# Altium PCB PCB.PcbDoc
Units mm, origin at the board's own origin, x right, y up, seen from the top; angles counter-clockwise.
Board outline 64.5 x 51 mm, 2 copper layers (Top Layer, Bottom Layer); 31 components, 10 nets, 70 pads, 5 vias.
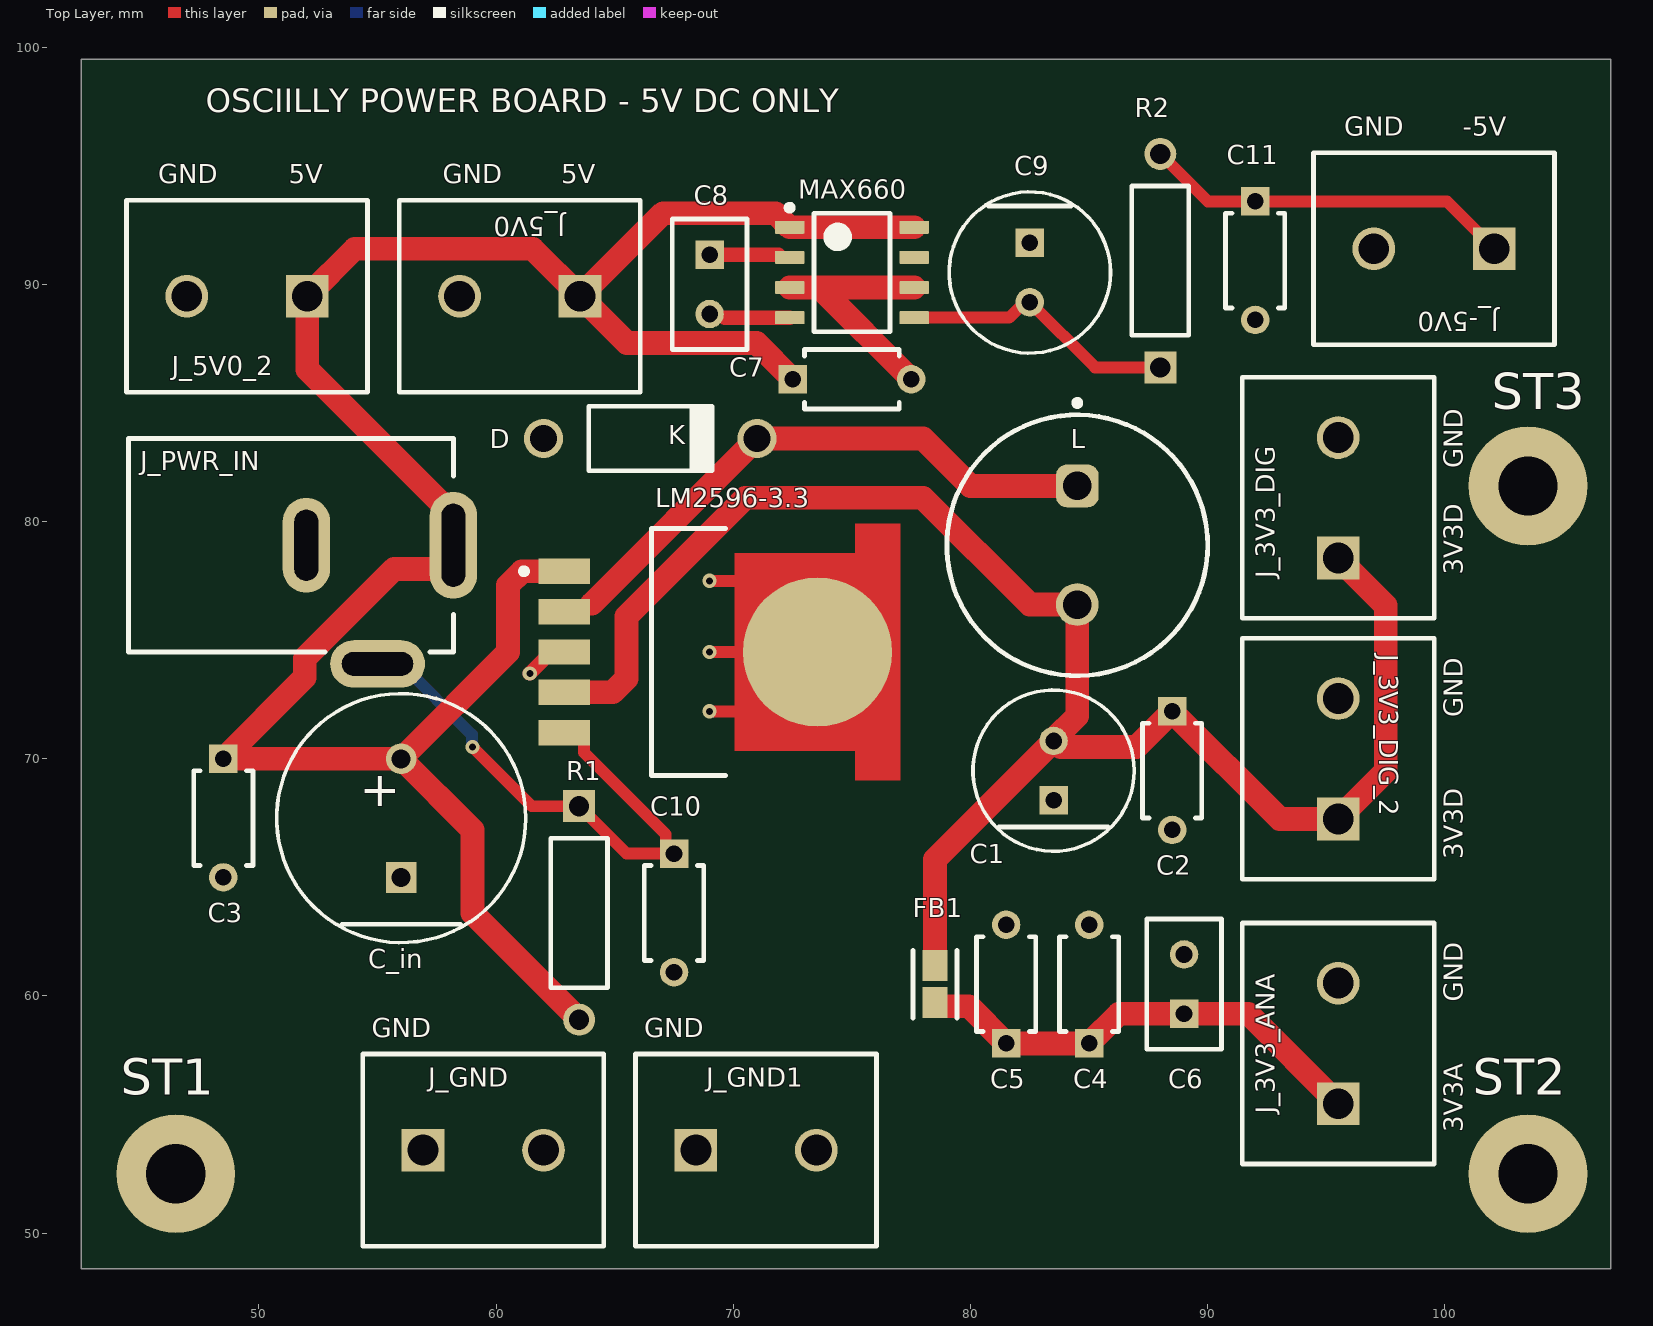
[diagram p0: Top Layer view]
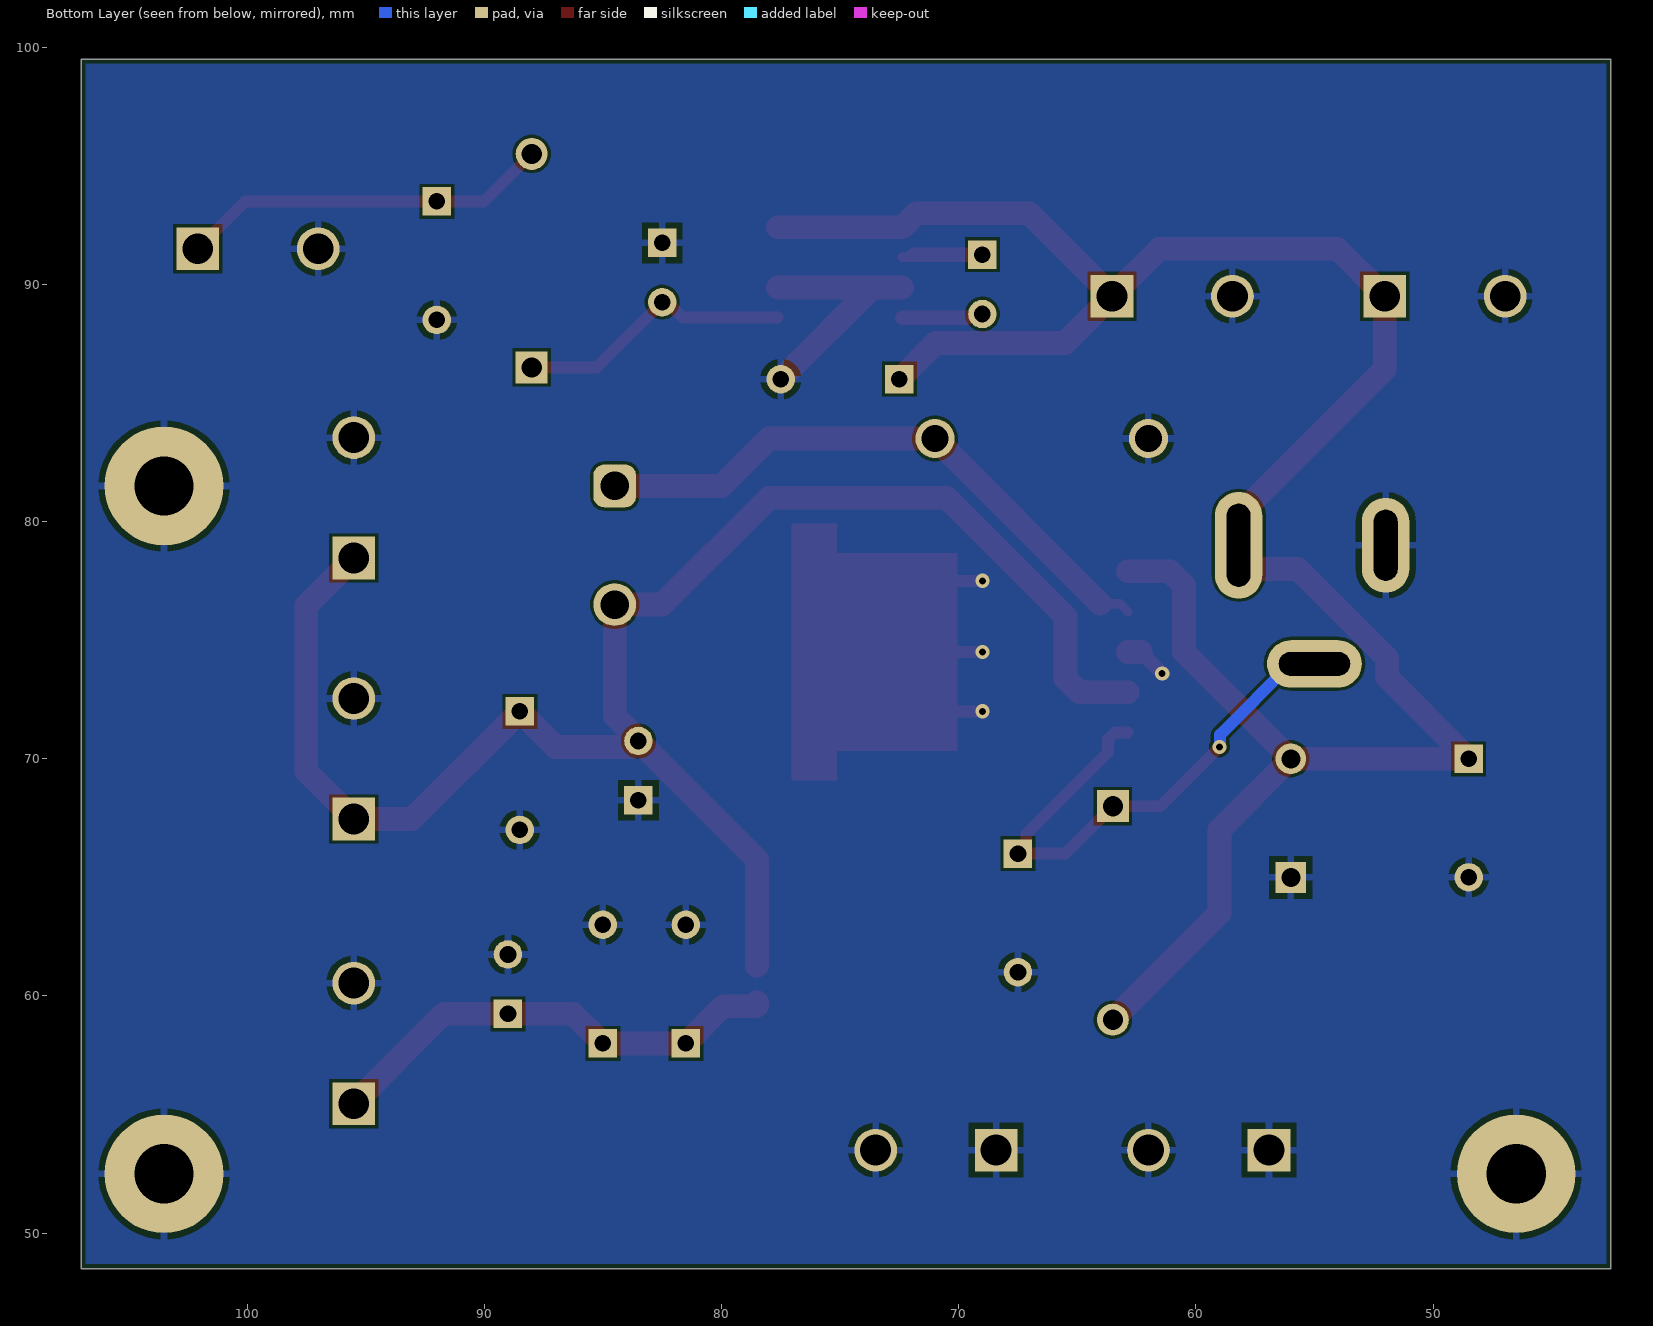
[diagram p1: Bottom Layer view, seen from below]
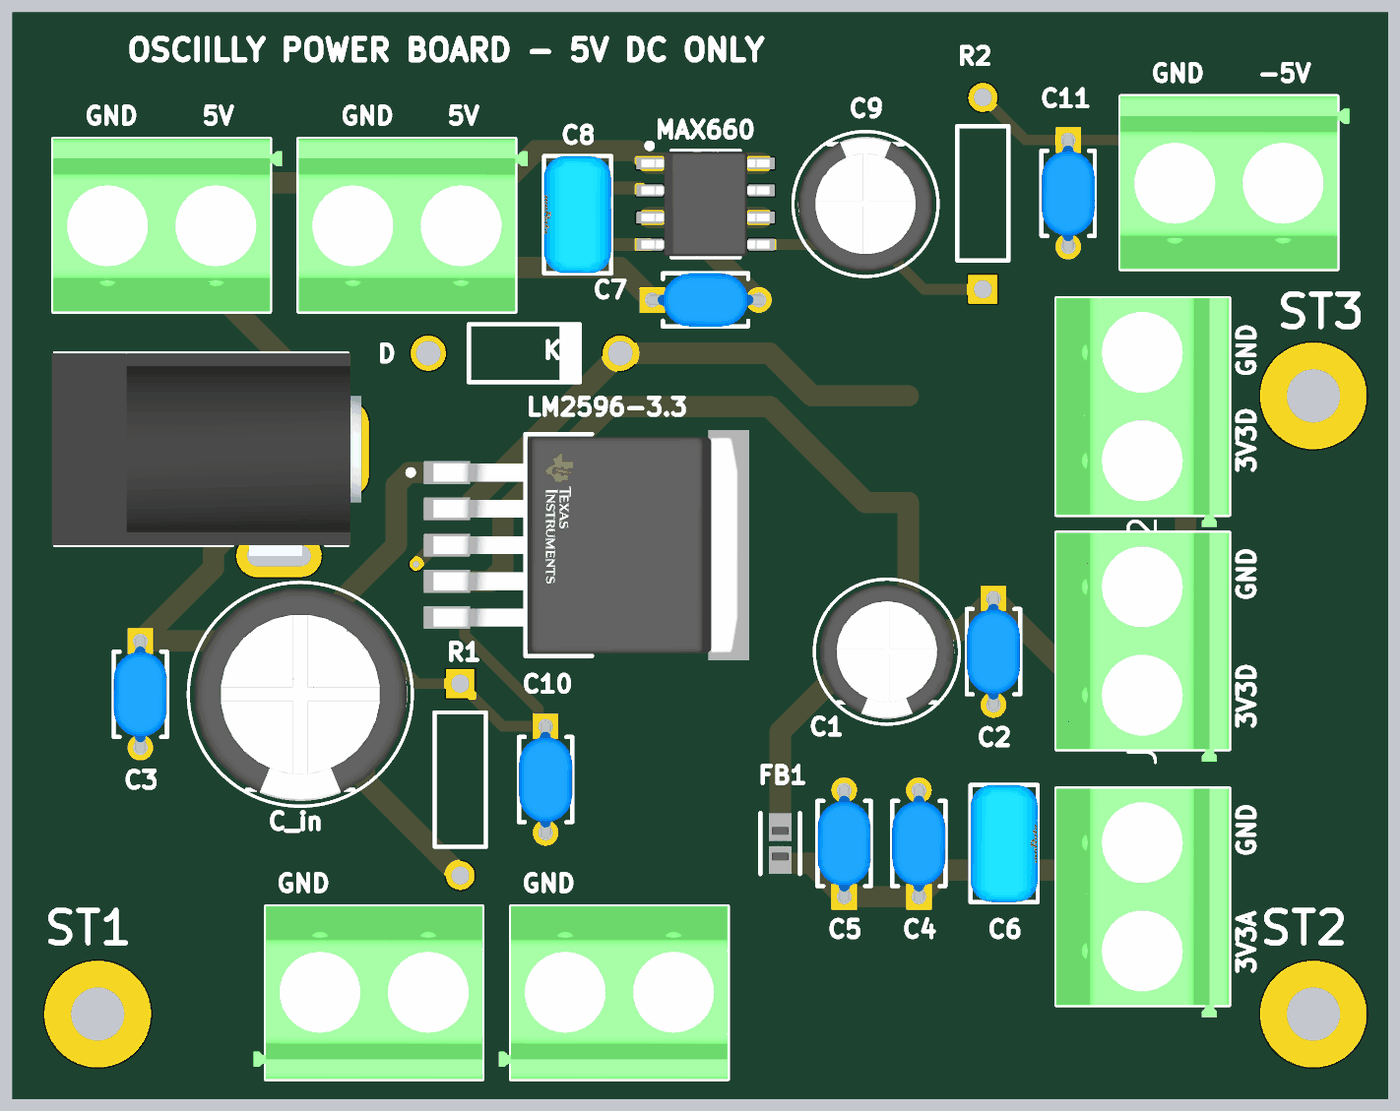
[diagram p2: 3D render of the assembled board from above, using the file's embedded part models]

## Layer stack, top to bottom
Top Solder: solder mask 0.0102, Solder Resist, Dk 3.5
Top Layer: signal copper 0.0356
Dielectric 1: dielectric 0.32, FR-4, Dk 4.8
Bottom Layer: signal copper 0.0356
Bottom Solder: solder mask 0.0102, Solder Resist, Dk 3.5

## Board outline
42.5,48.5 42.5,99.5 107,99.5 107,48.5

## Design rules (kind name [scope] priority, off if disabled: settings)
BoardOutlineClearance [All] p1: gap=0.2 ignorepadtopadclearanceinfootprint=FALSE
Clearance [All] p1: gap=0.127 ignorepadtopadclearanceinfootprint=FALSE except(0.25: Arc-Hole Track-Hole SMDPad-Hole THPad-Hole Via-Hole Fill-Hole Poly-Hole Region-Hole Text-Hole)
ComponentClearance [All] p1: gap=0.127 collisioncheckmode=3 verticalgap=0.127 showdistances=TRUE
DiffPairsRouting [All] p1: maxlimit=0.254 minlimit=0.127 mostfreqgap=0.127 toplayer_minwidth=0.127 toplayer_maxwidth=25.4 toplayer_prefwidth=0.127 bottomlayer_minwidth=0.127 bottomlayer_maxwidth=25.4 bottomlayer_prefwidth=0.127 maxuncoupledlength=12.7
Height [All] p1: minheight=0 maxheight=1816.048 prefheight=12.7
HoleSize [All] p1: absolutevalues=TRUE maxlimit=6.3 minlimit=0.3 maxpercent=80.000 minpercent=20.000
HoleToHoleClearance [All] p1: gap=0.25 allowstackedmicrovias=FALSE
MinimumAnnularRing [All] p1: minimumring=0.076
MinimumSolderMaskSliver [All] p1: minsoldermaskwidth=0
PlaneClearance [All] p1: clearance=0.127
PlaneConnect PlaneConnectPowerPads [InPadClass('PowerPads')] p1: planeconnectstyle=Direct reliefexpansion=0.508 reliefentries=4 reliefconductorwidth=0.254 reliefairgap=0.254
PlaneConnect [All] p2: pad.planeconnectstyle=Relief pad.reliefexpansion=0.3 pad.reliefentries=4 pad.reliefconductorwidth=0.127 pad.reliefairgap=0.127 via.planeconnectstyle=Direct via.reliefexpansion=0.3 via.reliefentries=4 via.reliefconductorwidth=0.127 via.reliefairgap=0.127
PolygonConnect PolygonConnectPowerPads [All vs (InPadClass('PowerPads'))] p1: connectstyle=Direct reliefconductorwidth=0.254 reliefentries=4 polygonreliefangle="90 Angle" airgapwidth=0.254
PolygonConnect [All] p2: thpad.connectstyle=Relief thpad.reliefconductorwidth=0.3 thpad.reliefentries=4 thpad.polygonreliefangle="90 Angle" thpad.airgapwidth=0.25 smdpad.connectstyle=Relief smdpad.reliefconductorwidth=0.3 smdpad.reliefentries=4 smdpad.polygonreliefangle="90 Angle" smdpad.airgapwidth=0.25 via.connectstyle=Direct via.reliefconductorwidth=0.127 via.reliefentries=4 via.polygonreliefangle="90 Angle" via.airgapwidth=0.127
RoutingVias [All] p1: holewidth=0.3 width=0.6 viastyle="Through Hole" minholewidth=0.3 minwidth=0.6 maxholewidth=0.6 maxwidth=6.6
SilkToSilkClearance [All] p1: silktosilkclearance=0
SilkToSolderMaskClearance [IsPad] p1: minsilkscreentomaskgap=0.127 clearancetoexposedcopper=TRUE
SolderMaskExpansion [All] p1: expansion=0.075 istentingtop=FALSE
SupplyNets "Schematic Supply Nets" [InNet('GND')] p1: voltage=0.000
Width [All] p1: maxlimit=25.4 minlimit=0.127 preferedwidth=0.127 minimp=50.000000 maximp=50.000000 favimp=50.000000
20 further rules are at their usual default settings.

## Components (designator, comment, footprint, x,y, rotation, side; value= is the part's Value field where it differs from the comment)
C1 "220UF" FP-RAD-TH-D_6_3_0_5-L_11-MFG 83.5,69.5 r90 top
C2 "0.1uF" FP-RDE0M1-MFG 88.5,69.5 r270 top
C3 "0.1uF" FP-RDE0M1-MFG 48.5,67.5 r270 top
C4 "0.1uF" FP-RDE0M1-MFG 85,60.5 r90 top
C5 "10nF" FP-RDE0M1-MFG 81.5,60.5 r90 top
C6 "10uF" FP-RDE2P1-MFG 89,60.5 r90 top
C7 "0.1uF" FP-RDE0M1-MFG 75,86 r0 top
C8 "10uF" FP-RDE2P1-MFG 69,90 r270 top
C9 "47uF" FP-RAD-TH-D_6_3_0_5-L_11-MFG 82.5,90.5 r270 top
C10 "0.1uF" FP-RDE0M1-MFG 67.5,63.5 r270 top
C11 "0.1uF" FP-RDE0M1-MFG 92,91 r270 top
C_in "680uF" FP-RAD-TH-D_10_0_5-L_25_2-MFG 56,67.5 r90 top
D "1N5824" FAIR-DO-41-2_V 66.5,83.5 r0 top
FB1 "BLM18KG700TZ1D" FP-BLM18-0_15-t0_6-d1_2-IPC_A 78.5,60.5 r270 top
J_3V3_ANA "1729128" PHOE-1729128-2_V 95.5,58 r90 top
J_3V3_DIG "1729128" PHOE-1729128-2_V 95.5,81 r90 top
J_3V3_DIG_2 "1729128" PHOE-1729128-2_V 95.5,70 r90 top
J_5V0 "1729128" PHOE-1729128-2_V 61,89.5 r180 top
J_5V0_2 "1729128" PHOE-1729128-2_V 49.5,89.5 r180 top
J_-5V0 "1729128" PHOE-1729128-2_V 99.54,91.5 r180 top
J_GND "1729128" PHOE-1729128-2_V 59.46,53.5 r0 top
J_GND1 "1729128" PHOE-1729128-2_V 70.96,53.5 r0 top
J_PWR_IN "KLDX-0202-B" KYCN-KLDX-0202-B_V 44.5,79 r0 top
L "33 UH" WE-TIS_1111 1354.5,-1191 r270 top
LM2596-3.3 "LM2596SX-3.3/NOPB" FP-KTT0005B-MFG 71,74.5 r270 top
MAX660 "MAX660M/NOPB" D0008A_L 75,90.5 r0 top
R1 "100k" RESA60-630X240 63.5,63.5 r270 top
R2 "1Ohm" RESA60-630X240 88,91 r90 top
ST1 "PTH-M2D5X5" PTH-M2D5X5 46.5,52.5 r0 top
ST2 "PTH-M2D5X5" PTH-M2D5X5 103.5,52.5 r0 top
ST3 "PTH-M2D5X5" PTH-M2D5X5 103.5,81.5 r0 top

## Footprints (in the part's own frame and the unit in brackets; to place one, negate y for a bottom-side part, rotate by r counter-clockwise, add the part's x,y. Pads: shape width x height; smd on the part's side, far side on the other; paste and mask are expansions set on the pad)
D0008A_L [mm] "SOIC, 8-Leads, Body 5x4mm, Pitch 1.27mm, IPC High Density"
  rrect18% 1.25x0.55 smd: 1(-2.625,1.905) 2(-2.625,0.635) 3(-2.625,-0.635) 4(-2.625,-1.905) 5(2.625,-1.905) 6(2.625,-0.635) 7(2.625,0.635) 8(2.625,1.905)
  silkscreen extent -2.75,-2.5 1.6,2.85, body extent -3,-2.45 3,2.45, height 1.63
FAIR-DO-41-2_V [mm] "2-Leads, Axial leaded, Body 2.72x5.2mm, Pin Spacing 9mm"
  round 1.65 hole 1.15: 1(-4.5,0) 2(4.5,0)
  silkscreen extent -2.6,-1.36 2.6,1.36, body extent -4.93,-1.36 4.93,1.36, height 2.71
FP-BLM18-0_15-t0_6-d1_2-IPC_A [mm]
  rect 1.306x1.058 smd paste+0 mask+0: 1(-0.776,0) 2(0.776,0)
  silkscreen extent -1.43,-0.93 1.43,0.93, body extent -1.93,-1.03 1.93,1.03, height 0.25
FP-KTT0005B-MFG [mm]
  rect 1.07x2.16 smd paste+0 mask+0: 1(-3.4,-8.13) 2(-1.7,-8.13) 3(0,-8.13) 4(1.7,-8.13) 5(3.4,-8.13)
  round 6.291 smd paste+0 mask+0: 6(0,2.545)
  Top Layer region: -5.4,6.04 5.4,6.04 5.4,4.13 4.165,4.13 4.165,-0.95 -4.165,-0.95 -4.165,4.13 -5.4,4.13 -5.4,6.04
  silkscreen extent -5.21,-9.95 5.21,-1.33, body extent -5.5,-9.31 5.5,6.14, height 0.25
FP-RAD-TH-D_6_3_0_5-L_11-MFG [mm]
  rect 1.2x1.2 hole 0.7 paste-2539.97 mask+0: 1(-1.25,0)
  round 1.2 hole 0.7 paste-2539.97 mask+0: 2(1.25,0)
  silkscreen extent -3.4,-3.4 3.4,3.4, body extent -3.5,-3.5 3.5,3.5, height 0.25
FP-RAD-TH-D_10_0_5-L_25_2-MFG [mm]
  rect 1.3x1.3 hole 0.8 paste-2539.97 mask+0: 1(-2.5,0)
  round 1.3 hole 0.8 paste-2539.97 mask+0: 2(2.5,0)
  silkscreen extent -5.25,-5.25 5.25,5.25, body extent -5.35,-5.35 5.35,5.35, height 0.25
FP-RDE0M1-MFG [mm]
  rect 1.2x1.2 hole 0.7 paste-2539.97 mask+0: 1(-2.5,0)
  round 1.2 hole 0.7 paste-2539.97 mask+0: 2(2.5,0)
  silkscreen extent -2,-1.25 2,1.25, body extent -3.2,-1.35 3.2,1.35, height 0.25
FP-RDE2P1-MFG [mm]
  rect 1.2x1.2 hole 0.7 paste-2539.97 mask+0: 1(-1.25,0)
  round 1.2 hole 0.7 paste-2539.97 mask+0: 2(1.25,0)
  silkscreen extent -2.75,-1.58 2.75,1.58, body extent -2.85,-1.68 2.85,1.68, height 0.25
KYCN-KLDX-0202-B_V [mm] "3 Conductor Jack, 9 x 14.5 mm Body"
  oval 2x4.5 hole 1 slot 3.5 at 90 deg: 1(13.7,0)
  oval 2x4 hole 1 slot 3 at 90 deg: 2(7.5,0)
  oval 4x2 hole 1 slot 3 at 0 deg: 3(10.5,-5)
  silkscreen extent 0,-4.5 13.7,4.5, body extent -0.15,-5 14.35,4.5, height 11
PHOE-1729128-2_V [mm] "Receptacle, 2-Leads, Body 8.1x10.16mm, Pitch 5.08mm"
  rect 1.8x1.8 hole 1.3: 1(-2.54,0)
  round 1.8 hole 1.3: 2(2.54,0)
  silkscreen extent -5.08,-4.05 5.08,4.05, body extent -5.65,-4.05 5.08,4.05, height 10.01
PTH-M2D5X5 [mm]
  round 5 hole 2.5: 1(0,0)
RESA60-630X240 [mm] "Axial Resistor, 2-Leads, Dia 2.4mm, Body Length 6.3mm"
  rect 1.35x1.35 hole 0.85: 1(-4.5,0)
  round 1.35 hole 0.85: 2(4.5,0)
  silkscreen extent -3.15,-1.2 3.15,1.2, body extent -3.15,-1.2 3.15,1.2, height 2.4
WE-TIS_1111 [mm] "THT Shielded Radial Leaded Wire Wound Inductor, body diameter 11mm"
  rrect50% 1.8x1.8 hole 1.2: 1(-1272.5,-1270)
  round 1.8 hole 1.2: 2(-1267.5,-1270)
  silkscreen extent -1276.12,-1275.5 -1264.5,-1264.5, body extent -1275.3,-1275.3 -1264.7,-1264.7, height 10.6

## Part data
C1: library part CMP-05427-000685-1, "Aluminum Electrolytic Capacitors (Radial Lead Type) AEC-Q200 Qualified 220uF ±20% 16V", Capacitance=220uF, Case/Package=Radial, Max Operating Temperature=105°C, Min Operating Temperature=-55°C, Package Quantity=2000, Ripple Current=180mA, Tolerance=20%, Voltage Rating=16V, Diameter=6.3mm, Height=11.2mm, Height - Seated (Max)=0.48inch, Lead Diameter=0.5mm, Lead Pitch=5mm, Lead/Base Style=Straight, Length=11.2mm, Life (Hours)=1000Hour, Mount="Through Hole", Packaging="Ammo Pack", Radiation Hardening=No, RoHS Compliant=Yes, Series=NHG, Termination=Radial, Voltage Rating (DC)=16V
C2 C3 C4 C7 C10 C11: library part CMP-06035-027534-1, "Ceramic Capacitor 100nF ±10% 25V X7R Radial", Capacitance=100nF, Case/Package=Radial, Dielectric=X7R, Max Operating Temperature=125°C, Min Operating Temperature=-55°C, Package Quantity=2000, Resistor Type=Ceramic, Tolerance=10%, Voltage Rating=25V, Height=3.5mm, Height - Seated (Max)=0.236inch, Lead Diameter=0.5mm, Lead Free="Lead Free", Lead Pitch=0.197inch, Length=0.157inch, Mount="Through Hole", Packaging="Tape and Reel", Termination=Radial, Voltage Rating (DC)=25V, Width=3.5mm
C5: library part CMP-06035-046067-1, "Ceramic Capacitor 10nF ±10% 100V X7R Radial", Case/Package=Radial, Dielectric=X7R, Max Operating Temperature=125°C, Min Operating Temperature=-55°C, Package Quantity=1, Resistor Type=Ceramic, Tolerance=10%, Voltage Rating=100V, Capacitance=10nF, Height=3.5mm, Height - Seated (Max)=0.236inch, Lead Diameter=0.5mm, Lead Pitch=0.197inch, Lead/Base Style=Kinked, Length=0.157inch, Mount="Through Hole", Packaging="Cut Tape", Termination=Radial, Voltage Rating (DC)=100V, Width=0.098inch
C6 C8: library part CMP-06035-025589-1, "Ceramic Capacitor 10uF ±10% 25V X7S Radial", Case/Package=Radial, Dielectric=X7S, Max Operating Temperature=125°C, Min Operating Temperature=-55°C, Package Quantity=500, Resistor Type=Ceramic, Tolerance=10%, Voltage Rating=25V, Capacitance=10uF, Height=4mm, Height - Seated (Max)=0.236inch, Lead Diameter=0.5mm, Lead Pitch=0.098inch, Lead/Base Style=Kinked, Length=5.5mm, Mount="Through Hole", Packaging=Bulk, Termination=Radial, Voltage Rating (DC)=25V, Width=0.124inch
C9: library part CMP-05427-000942-1, "Aluminum Electrolytic Capacitors (Radial Lead Type) 47uF ±20% 63V", Case/Package=Radial, ESR (Equivalent Series Resistance)=210mR, Max Operating Temperature=105°C, Min Operating Temperature=-40°C, Package Quantity=1, Ripple Current=284mA, Tolerance=20%, Voltage Rating=63V, Capacitance=47uF, Diameter=6.3mm, Height=11.2mm, Height - Seated (Max)=0.5inch, Impedance=210mR, Lead Diameter=0.5mm, Lead Free="Lead Free", Lead Pitch=5mm, Length=11.2mm, Life (Hours)=5000Hour, Mount="Through Hole", Packaging="Tape and Reel", Radiation Hardening=No, REACH SVHC=Yes, RoHS Compliant=Yes, Series=FR, Termination=Radial, Voltage Rating (DC)=63V
C_in: library part CMP-05427-001807-1, "Aluminum Electrolytic Capacitors (Radial Lead Type) 680uF ±20% 35V"
D: library part CMP-0892-00012-1, "Zener Diode, 7.5V, 1W, 5%, -65 to 200 degC, 2-Pin DO-41, Body 2.72 x 5.2 mm, RoHS", Manufacturer="Fairchild Semiconductor", Operating and Storage Temperature Range="-65 to 200 degC", PartNumber=1N4737A, Test Current IZ (mA)=34, Tolerance=5%, ComponentLink1Description="Manufacturer URL", ComponentLink1URL=http://www.fairchildsemi.com/, ComponentLink2Description=Datasheet, ComponentLink2URL=http://www.fairchildsemi.com/ds/1N/1N4744A.pdf, ComponentLink3Description="Package Specification", ComponentLink3URL=http://www.fairchildsemi.com/dwg/DO/DO41A.pdf, DatasheetVersion="Rev. H3", IR (uA)=10, Mounting Technology="Through Hole", PackageDescription="2-Pin Axial leaded, Body 2.72 x 5.2 mm, Lead Spread 25.4 mm", PackageReference=DO-41-2, PackageVersion="Rev. 2", PD (W)=1, RoHS=TRUE, VZ (Max.) (V)=7.875, VZ (Min.) (V)=7.125, ZZ (Max) (ohm)=3.5
FB1: library part CMP-06046-001603-2, "Chip Ferrite Bead Array, 0603, 70Ω @ 100MHz, 25%, 0.022Ω, 3.5A", RoHS Compliant=Yes
J_3V3_ANA J_3V3_DIG J_3V3_DIG_2 J_5V0 J_5V0_2 J_-5V0 J_GND J_GND1: library part CMP-2000-05815-1, "PCB Terminal Block, 13.5 A, 400 V, 2-Pin THD, RoHS, Bulk", Current Rating=13500mA, Manufacturer="Phoenix Contact", Package Description="2-Pin Through Hole Device, Body 8.1 x 10.16 mm, Pitch 5.08 mm", Package Reference=1729128-2, Package Version=03/2015, Voltage Rating=400V, Datasheet URL=https://datasheet.ciiva.com/16046/1729128-16046181.pdf, Datasheet Version=12/2013, Manufacturer URL=http://www.phoenixcontact.com/, Mounting Technology=ThroughHole, No. of Positions=2, No. of Rows=1, Orientation=Horizontal, Package URL=https://www.phoenixcontact.com/online/portal/pi/pxc/product_detail_page/!ut/p/b1/3VdJjqNKFDxLH8AFycySyWY2ozFsEPOMMQaDOX1XedGL_1Vdm5YXJleknhSKeBkvI6EA8ncAo3AYoDhBQGco6KN7VURTdemj9us_IEKEZo_YHiPAEWEFmDGOHMORkqKYCORBZxgL7ZoaZYcbFFUZ3fqxSY6GOuxydWUuHqz1ynmMFygu583Bob0Ewr6Sd_l-5m-kAueHiB0jpRwZwe58wwtkpxtMYd_LmGcDRU02dRNEyWt6Y2ti5pSyJ_reIkzIulrqApdnbT11V5jnCKbYNCvhEM1MCpPByat_X379-iThf08CI5GfOPqfBeS3BRoBOdD55AKVv0iLwCMq-2BrzXWSGRH7pUGD9uwXQjiph3xL0DKQwdGa0JImiIOmBNOestqgwTHSSs2oOep-78apyXQBvNi8ZLaFjvjWvcaUEBu0MC6Wbe-d6mB0FAebo2lUWinqYaZs5DAYzV0RP9yitUjnGJ0iI9xhZkT42OCQNUJJhkgWINNQLP2JFP6OpMg3JCVg70jqHT0lvKOnhHf0lPuOnnLf0VPuWx6_dxwUIvwk5WMkT0kLL1mh61l2yZVSzG3pYV_bqo-mj6uMKwKwdnnW8Jh5RTOJzMOA5c-eJDaZQw4mTMPH02PvS_ZAqNVjVTo2WyYLkwH_KU1mmmG5kjRhDqPXLwwVHvVOjCM60-fpXvTDfMGW1PVFVS1r4e4yVDk4ZdNbkUHvqPqQSeian4UD39fNKmachqdJ1NJbyk8rXT9mXTvPk3oE5meulKGgiruPJek-4I9hTT6G8ZLOyRSm2RRVbThERQad5OS28hdt4YW4vG0stgYYzsWsK4_7y6DZMjJSCqri1kyiZR5vD7pwIrNR7QwPHTcLTI5qT7eRlpHrdGiupYlqQDJ7zy_CND8fWWBoLRXxk1RVcXiBQwbTD4Xi7KL-FuO94t9xaqweXzH, Packing=Bulk, PartNumber=1729128, Pitch=5.08mm, RoHS=TRUE
J_PWR_IN: library part CMP-0256-00001-1, "3 Conductor Power Jack, 2 break 2 aux contacts", ComponentLink1Description="Manufacturer URL", ComponentLink1URL=http://kycon.com/, ComponentLink2Description=Datasheet, ComponentLink2URL=http://anacapa.kycon.com/Catalog_PDF/KLDX_0202.pdf, Contact Finish=Brass, Mounting Technology="Through Hole", PackageDescription="Jack, 9 x 14.5 mm Body, 2.5 mm Center Pin Diameter", PackageReference=KLDX-0202-B, PartNumber=KLDX-0202-B
L: library part CMP-1406-00003-3, "Inductor Power Shielded Wirewound 33uH 20% 1KHz Ferrite 3.6A 61mOhm DCR RDL Tray", Ambient Temperature Range High=85°C, Ambient Temperature Range Low=-40°C, Case/Package=Radial, Current Rating=3A, DC Resistance (DCR)=57mΩ, Frequency=10MHz, Inductance=33µH, Inductance Tolerance=20%, Max DC Current=3.6A, Max Operating Temperature=125°C, Saturation Current=2.8A, Series Resistance=50mΩ, Test Frequency=1kHz, Core Material=Ferrite, Diameter=11mm, Features=Shielded, Height=11.5mm, Lead Diameter=650µm, Lead Pitch=5mm, Length=11mm, Min Operating Temperature=-40°C, Mount="Radial, Through Hole", Number of Pins=2, REACH SVHC=Unknown, RMS Current (Irms)=3.6A, RoHS=Compliant, Self Resonant Frequency=10MHz, Shielding=Shielded, Tolerance=20%, Width=11mm
LM2596-3.3: library part CMP-04918-000394-1, "IC REG BUCK 3.3V 3A TO263-5", Case/Package=TO-263-5, Max Input Voltage=40V, Max Operating Temperature=125°C, Max Output Current=3A, Min Input Voltage=4.5V, Min Operating Temperature=-40°C, Min Output Voltage=3.3V, Operating Supply Current=5mA, Package Quantity=500, Switching Frequency=173kHz, Efficiency=73%, Lead Free="Contains Lead", Min Supply Voltage=4.5V, Mount="Surface Mount", Nominal Output Voltage=3.3V, Number of Outputs=1, Number of Pins=5, Operating Supply Voltage=40V, Output Configuration=Positive, Output Current=3A, Output Type=Fixed, Output Voltage=3.3V, Packaging="Cut Tape", Quiescent Current=5mA, Radiation Hardening=No, REACH SVHC="No SVHC", RoHS Compliant=Yes, Series=LM2596, Synchronous Rectifier=No, Weight=0.056128oz
MAX660: library part CMP-0065-00036-3, "Switched Capacitor Voltage Converter, 8-pin Narrow SOIC, Pb-Free", Manufacturer="Texas Instruments", PackageTopMarking=NSZXTT*MAX*660M, PowerWise=N, Code_IPC=SOIC127P600-8, Code_JEDEC=MS-012-AA, ComponentLink1Description="Datasheet URL", ComponentLink1URL=http://www.ti.com/general/docs/lit/getliterature.tsp?genericPartNumber=MAX660&fileType=pdf, CompType="Switch Caps", PackageDescription="SOIC Narrow, 4.9 x 3.9 x 1.45mm, 8 Lead, 1.27mm Pitch", PackageReference=D0008A, PinCount=8, RoHS=Y
R1 R2: library part CMP-1659-00070-1, "Axial Resistor, 1 MOhm, +/- 1%, 250 mW, -55 to 155 degC, 2-Pin THD, RoHS, Bulk", Case\Package=Axial, Max Operating Temperature="155 degC", Min Operating Temperature="-55 degC", Package Quantity=200, Power Rating="250 mW", Resistance="47.5 kohm", Tolerance=1%, Voltage Rating="250 V", ComponentLink1Description="Manufacturer URL", ComponentLink1URL=http://www.yageo.com/, ComponentLink2Description=Datasheet, ComponentLink2URL=http://www.yageo.com/documents/recent/Yageo%20LR_MFR_2013.pdf, DatasheetVersion=Apr-13, Length="0.248 inch", Mount="Through Hole", PackageDescription="2-Pin Axial Lead, Dia 2.4 mm, Body Length 6.3 mm", PackageReference=MFR-25, Packaging=Bulk, RoHSCompliant=true
ST1 ST2 ST3: library part CMP-00028-00004-2, "M2 PTH (2.5mm), 5mm pad", Pins=1

## Via types
v1: diameter 0.6, hole 0.3, Top Layer to Bottom Layer, 5 vias

## Nets (pads, with @x,y where several pads share a name; then routed paths per layer and width w, separated by ;. In a path a pad name is that pad's centre, name@x,y a point inside that pad or via, vN(x,y) a via of type N, cw(c..) or ccw(c..) an arc to the next point about the centre after c; other vN are vias at no path point)
3V3_ANA: C4.1 C5.1 C6.1 FB1.2 J_3V3_ANA.1 | length 19.9
  Top Layer w1: FB1.2 78.5,59.6 78.529,59.571 79.929,59.571 C5.1 C4.1 86.25,59.25 C6.1 91.71,59.25 J_3V3_ANA.1
3V3_DIG: C1.2 C2.1 FB1.1 J_3V3_DIG.1 J_3V3_DIG_2.1 L.2 LM2596-3.3.4 | length 73.4
  Top Layer w1: LM2596-3.3.4 64.914,72.8 65.5,73.386 65.5,76 70.5,81 78,81 82.5,76.5 L.2 84.5,71.804 83.5,70.804 C1.2 ; FB1.1 78.5,65.75 C1.2 ; J_3V3_DIG.1 97.5,76.46 97.5,69.46 J_3V3_DIG_2.1 93.04,67.46 C2.1 87,70.5 83.804,70.5 83.554,70.75 C1.2
5V0: C3.1 C7.1 C_in.2 J_5V0.1 J_5V0_2.1 J_PWR_IN.1 LM2596-3.3.1 MAX660.1 MAX660.8 R1.2 | length 100
  Top Layer w1: LM2596-3.3.1 61.086,77.9 60.5,77.314 60.5,74.5 C_in.2 ; R1.2 59,63.5 59,67 C_in.2 ; C7.1 70.977,87.523 65.517,87.523 J_5V0.1 ; MAX660.8 MAX660.1 71.78,93 67.04,93 J_5V0.1 ; C_in.2 C3.1 51.929,73.429 51.929,74.23 55.7,78.001 57.738,78.001 58.2,78.463 J_PWR_IN.1 58.2,80.25 52.04,86.41 J_5V0_2.1 54.04,91.5 61.54,91.5 J_5V0.1
-5V0: C11.1 J_-5V0.1 R2.2 | length 15.7
  Top Layer w0.5: R2.2 90,93.5 C11.1 100.08,93.5 J_-5V0.1
DC_JACK_SW: C10.1 J_PWR_IN.3 LM2596-3.3.5 R1.1 | length 23.4
  Top Layer w0.5: v1(59,70.5) 61.5,68 R1.1 65.5,66 C10.1 67.15,66.35 67.15,66.82 63.7,70.27 63.7,70.815 63.415,71.1 LM2596-3.3.5
  Bottom Layer w0.5: J_PWR_IN.3 56,74 58.981,71.019 58.981,70.519 v1(59,70.5)
GND: C1.1 C2.2 C3.2 C4.2 C5.2 C6.2 C7.2 C9.1 C10.2 C11.2 C_in.1 D.1 J_3V3_ANA.2 J_3V3_DIG.2 J_3V3_DIG_2.2 J_5V0.2 J_5V0_2.2 J_-5V0.2 J_GND1.1 J_GND1.2 J_GND.1 J_GND.2 J_PWR_IN.2 LM2596-3.3.3 LM2596-3.3.6 MAX660.3 MAX660.6 ST1.1 ST2.1 ST3.1 | length 21.7
  Top Layer w0.5: v1(69,72) 71.5,72 ; v1(69,74.5) LM2596-3.3.6 ; v1(69,77.5) 71,77.5
  Top Layer w0.6: v1(61.422,73.597) LM2596-3.3.3@62.325,74.5
  Top Layer w1: LM2596-3.3.3@62.325,74.5 LM2596-3.3.3 ; MAX660.3 73.5,89.865 ; C7.2 73.635,89.865 73.5,89.865 ; MAX660.6 73.5,89.865
NetC8_1: C8.1 MAX660.2 | length 3.4
  Top Layer w0.4: MAX660.2@71.91,91.25 72.025,91.135 MAX660.2
  Top Layer w0.6: C8.1 MAX660.2@71.91,91.25
NetC8_2: C8.2 MAX660.4 | length 3.4
  Top Layer w0.4: C8.2 69.153,88.597 69.632,88.597 69.634,88.595
  Top Layer w0.6: 69.634,88.595 MAX660.4
NetC9_2: C9.2 MAX660.5 R2.1 | length 11.8
  Top Layer w0.4: C9.2@82.284,89.25 C9.2
  Top Layer w0.5: MAX660.5 81.629,88.595 C9.2@82.284,89.25 ; C9.2 85.25,86.5 R2.1
NetD_2: D.2 L.1 LM2596-3.3.2 | length 25.5
  Top Layer w0.4: LM2596-3.3.2 63.205,76.535 64.035,76.535
  Top Layer w1: 64.035,76.535 D.2 78,83.5 80,81.5 L.1
pads on no net: MAX660.7

## Polygon pours and split planes (outlines as drawn)
GND on Bottom Layer "GND_L02_P000" (solid, remove dead copper, pour order 0): 42.5,99.5 107,99.5 107,48.5 42.5,48.5

## Silkscreen, mask and mechanical layers (free items; w line width, h text height)
Top Overlay:
  text "OSCIILLY POWER BOARD - 5V DC ONLY" at 47.754,97.254 h1
  text "GND" at 95.754,96.254 h0.8
  text "-5V" at 100.754,96.254 h0.8
  text "GND" at 45.754,94.254 h0.8
  text "5V" at 51.254,94.254 h0.8
  text "GND" at 57.754,94.254 h0.8
  text "5V" at 62.754,94.254 h0.8
  text "K" at 67.254,83.254 h0.8
  text "GND" at 100.746,82.254 h0.8 r90
  text "3V3D" at 100.746,77.754 h0.8 r90
  text "GND" at 100.746,71.754 h0.8 r90
  text "+" at 54.254,68.004 h1.5
  text "3V3D" at 100.746,65.754 h0.8 r90
  text "GND" at 100.746,59.754 h0.8 r90
  text "GND" at 54.754,58.254 h0.8
  text "GND" at 66.254,58.254 h0.8
  text "3V3A" at 100.746,54.254 h0.8 r90
Mechanical 1:
  lines w0.254: 42.5,48.5 42.5,99.5 107,99.5 107,92.125 107,71.875 107,48.5 42.5,48.5